# Altium PCB bdd_ext_pmm.PcbDoc
Units mm, origin at the board's own origin, x right, y up, seen from the top; angles counter-clockwise.
Board outline 42.5 x 45 mm, 2 copper layers (Top Layer, Bottom Layer); 5 components, 5 nets, 8 pads, 41 vias.
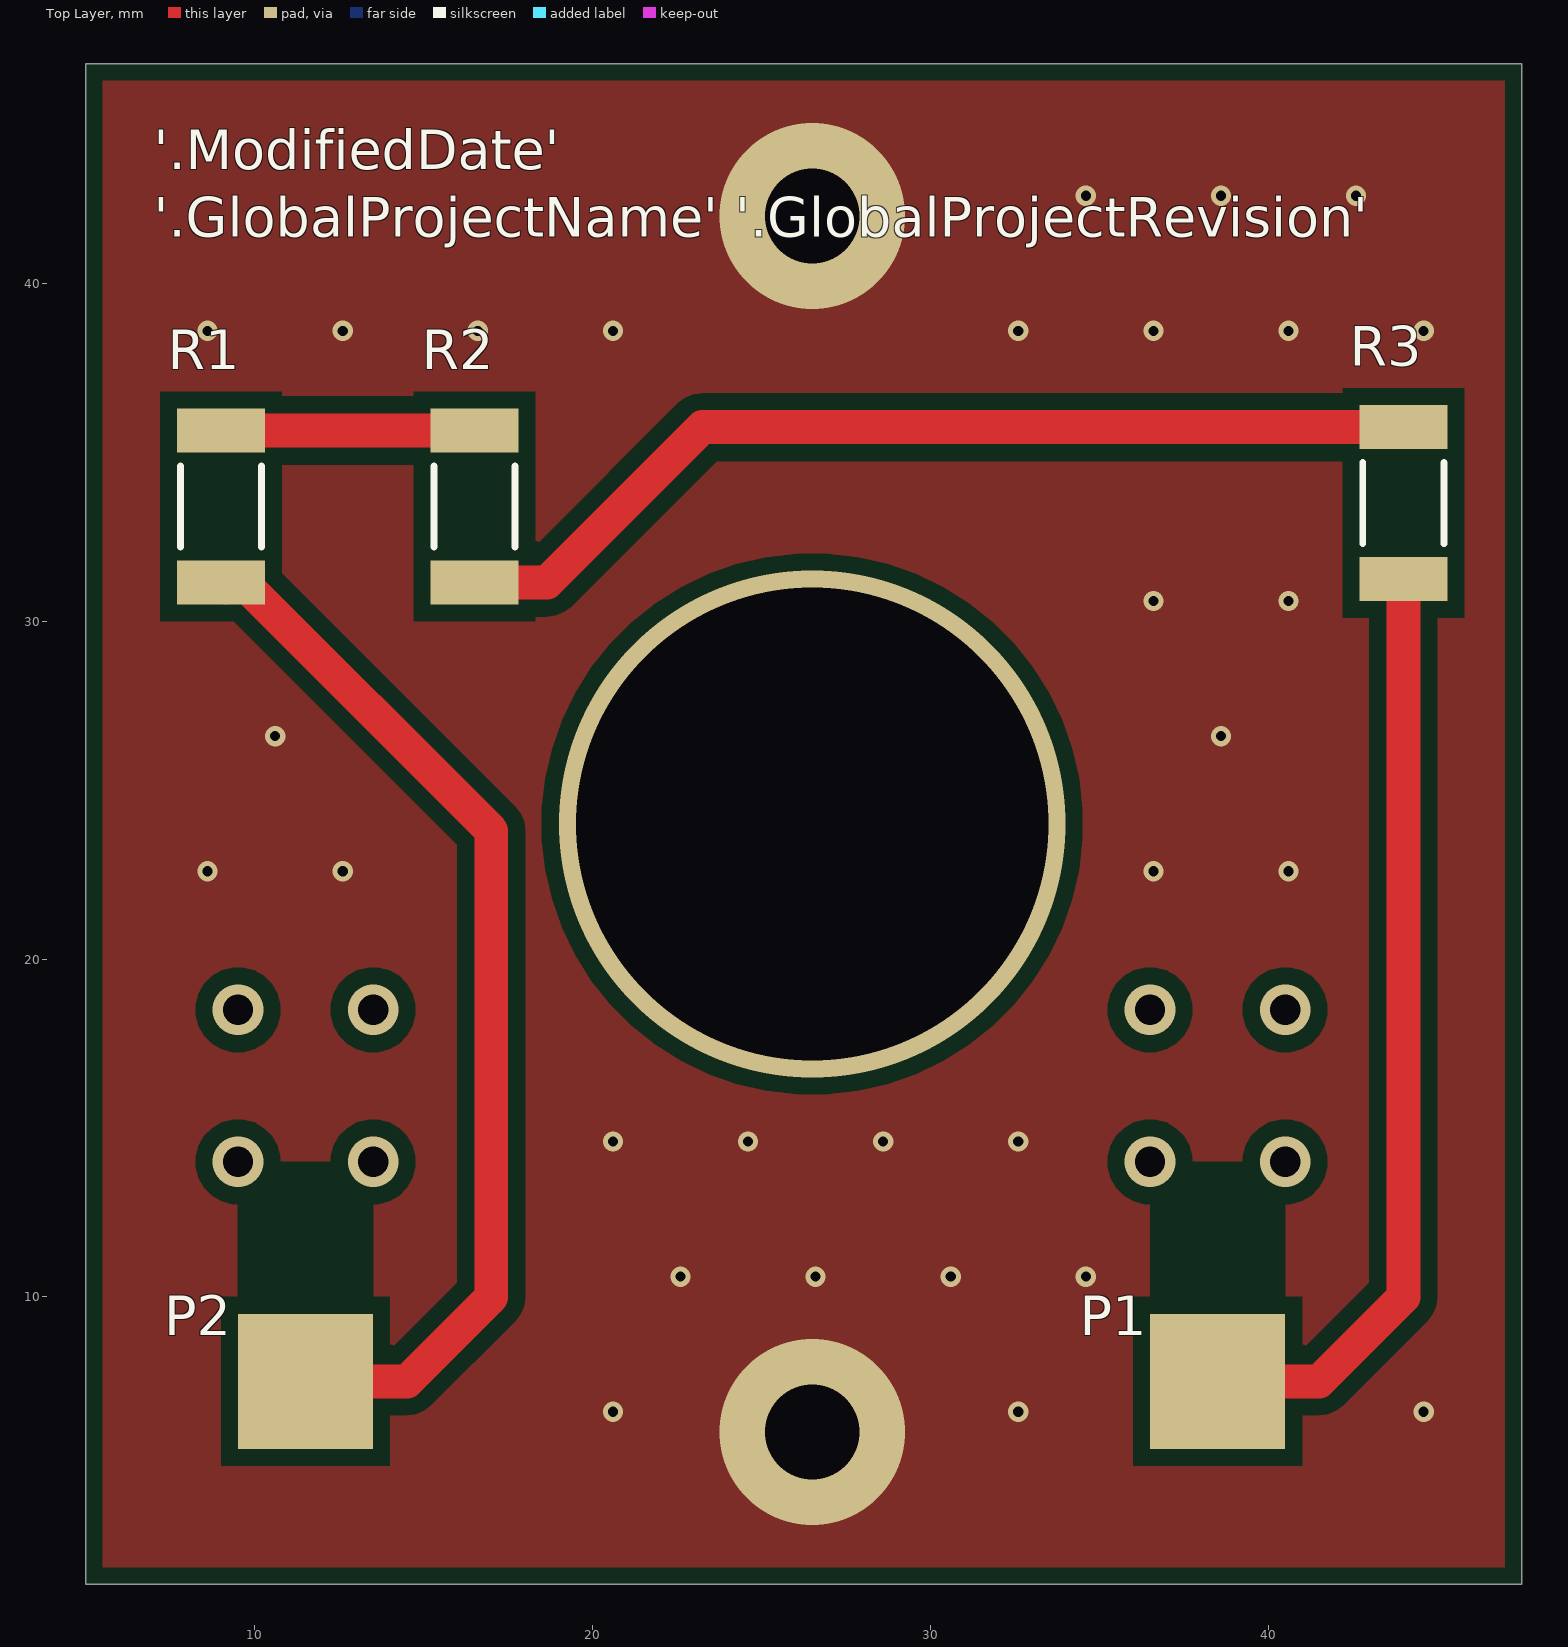
[diagram p0: Top Layer view]
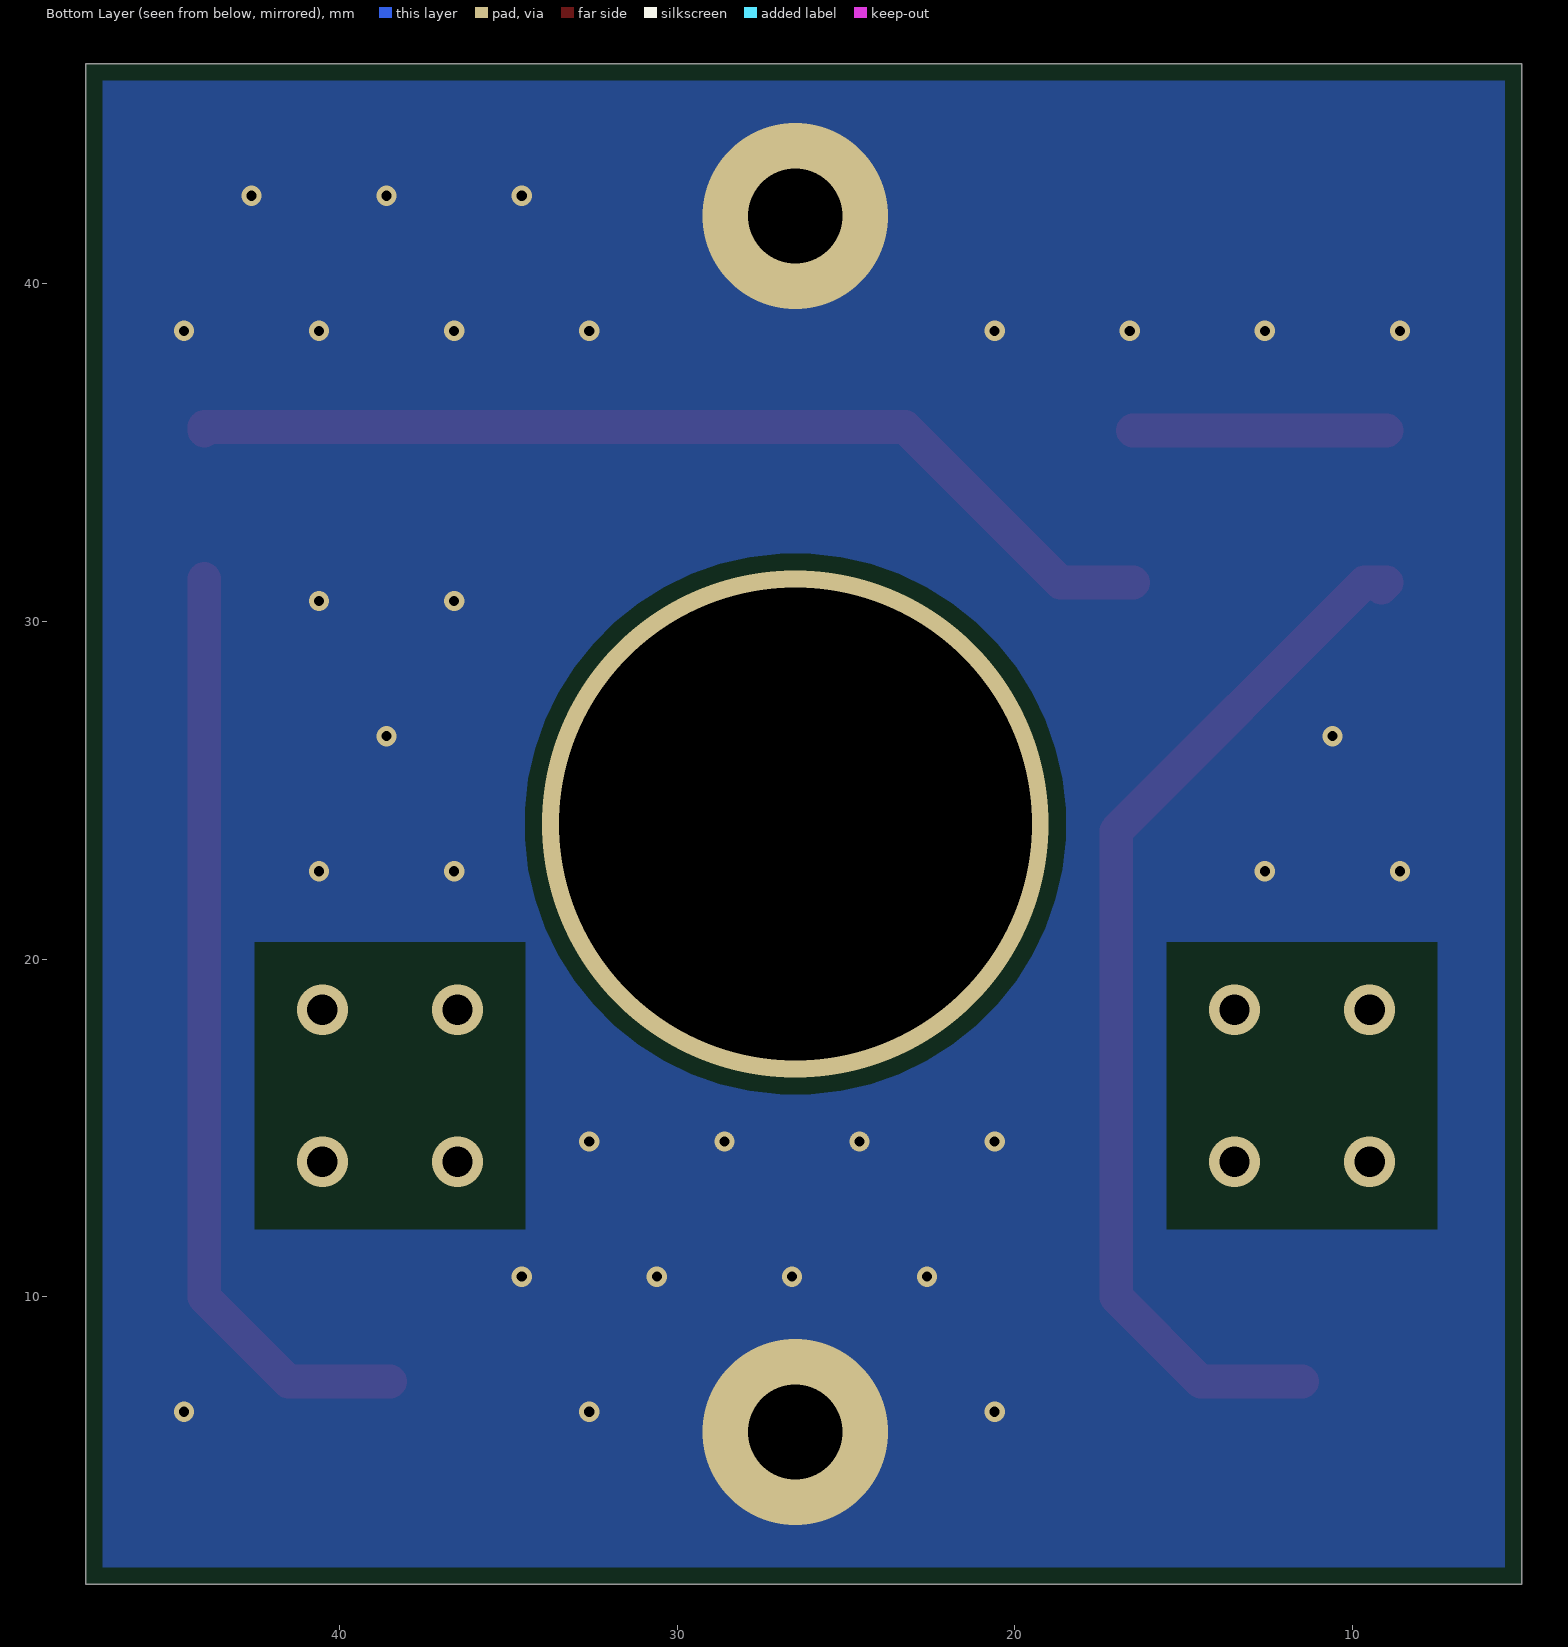
[diagram p1: Bottom Layer view, seen from below]

## Layer stack, top to bottom
Top Solder: solder mask 0.0102, Solder Resist, Dk 3.5
Top Layer: signal copper 0.0356
Dielectric 1: dielectric 0.32, FR-4, Dk 4.8
Bottom Layer: signal copper 0.0356
Bottom Solder: solder mask 0.0102, Solder Resist, Dk 3.5

## Board outline
5,1.5 47.5,1.5 47.5,46.5 5,46.5

## Design rules (kind name [scope] priority, off if disabled: settings)
Clearance "Stitching GND" [IsStitchingVia and InNet('GND') vs (IsVia and (Not IsStitchingVia)) Or IsPad] p1: gap=0.127 ignorepadtopadclearanceinfootprint=FALSE except(0.5: Arc-Via Track-Via SMDPad-Via THPad-Via Via-Via Via-Fill Via-Poly Via-Region Via-Text Via-Hole)
Clearance [All] p2: gap=0.5 ignorepadtopadclearanceinfootprint=FALSE
PolygonConnect [All] p1: connectstyle=Direct reliefconductorwidth=0.254 reliefentries=4 polygonreliefangle="90 Angle" airgapwidth=0.254
RoutingVias [All] p1: holewidth=0.711 width=1.27 viastyle="Through Hole" minholewidth=0.711 minwidth=1.27 maxholewidth=0.711 maxwidth=1.27
SolderMaskExpansion [All] p1: expansion=0.102 istentingtop=FALSE
Width [All] p1: maxlimit=1 minlimit=0.254 preferedwidth=0.8
30 further rules are at their usual default settings.

## Components (designator, comment, footprint, x,y, rotation, side; value= is the part's Value field where it differs from the comment)
P1 "PAD1" PAD1#1 38.5,8 r0 top
P2 "PAD1" PAD1#2 11.5,7.5 r0 top
R1 "2010" SMD_2010_1 9,33.4 r90 top value=500k
R2 "2010" SMD_2010_1 16.5,33.4 r270 top value=500k
R3 "2010" SMD_2010_1 44,33.5 r270 top value=500k

## Footprints (in the part's own frame and the unit in brackets; to place one, negate y for a bottom-side part, rotate by r counter-clockwise, add the part's x,y. Pads: shape width x height; smd on the part's side, far side on the other; paste and mask are expansions set on the pad)
PAD1#1 [mm]
  rect 4x4 smd: 1(0,-0.5)
PAD1#2 [mm]
  rect 4x4 smd: 1(0,0)
SMD_2010_1 [mm] "Chip Resistor, 2-Leads, Body 5,00x2,50mm, IPC Medium Density"
  rect 1.3x2.6 smd: 1(-2.25,0) 2(2.25,0)
  silkscreen extent -1.2,-1.2 1.2,1.2, body extent -2.55,-1.3 2.55,1.3, height 0.6

## Part data
R1 R2 R3: library part Resistor, "Resistor", Назначение=SMD-резистор, Наименование=R, Потребление, Вт=0,001, Точность=%

## Via types
v1: diameter 0.6, hole 0.3, Top Layer to Bottom Layer, 30 vias
v2: diameter 1.5, hole 0.9, Top Layer to Bottom Layer, 8 vias
v3: diameter 5.5, hole 2.8, Top Layer to Bottom Layer, 2 vias
v4: diameter 15, hole 14, Top Layer to Bottom Layer, 1 vias

## Nets (pads, with @x,y where several pads share a name; then routed paths per layer and width w, separated by ;. In a path a pad name is that pad's centre, name@x,y a point inside that pad or via, vN(x,y) a via of type N, cw(c..) or ccw(c..) an arc to the next point about the centre after c; other vN are vias at no path point)
GND: 
  other v1: 20.6,6.6 32.6,6.6 44.6,6.6 22.6,10.6 26.6,10.6 30.6,10.6 34.6,10.6 20.6,14.6 24.6,14.6 28.6,14.6 32.6,14.6 8.6,22.6 12.6,22.6 36.6,22.6 40.6,22.6 10.6,26.6 38.6,26.6 36.6,30.6 40.6,30.6 8.6,38.6 12.6,38.6 16.6,38.6 20.6,38.6 32.6,38.6 36.6,38.6 40.6,38.6 44.6,38.6 34.6,42.6 38.6,42.6 42.6,42.6
  other v3: 26.5,6 26.5,42
NetP1_1: P1.1 R3.2 | length 27.8
  Top Layer w1: P1.1 41.5,7.5 44,10 R3.2
NetP2_1: P2.1 R1.1 | length 31.6
  Top Layer w1: R1.1@9.15,31 R1.1 9.65,31.15 17,23.8 17,10 14.5,7.5 P2.1
NetR1_2: R1.2 R2.1 | length 7.5
  Top Layer w1: R1.2 R2.1
NetR2_2: R2.2 R3.1 | length 29.5
  Top Layer w1: R2.2 18.65,31.15 23.25,35.75 43.9,35.75 44,35.65 R3.1
copper on no net:
  other v2: 9.5,14 13.5,14 36.5,14 40.5,14 9.5,18.5 13.5,18.5 36.5,18.5 40.5,18.5
  other v4: 26.5,24

## Polygon pours and split planes (outlines as drawn)
GND on Top Layer "GND_L01_P000" (solid, pour order 0): 5.5,2 47,2 47,46 5.5,46
no net on Bottom Solder "NONET_L-01_P-001" (solid): 5.5,46 47,46 47,2 5.5,2
GND on Bottom Layer "GND_L02_P001" (solid, pour order 1): 5.5,2 47,2 47,46 5.5,46

## Other copper
Top Layer:
  pour cut-out: 14.7,36.5 14.7,30 18.3,30 18.3,36.5
  pour cut-out: 42.2,36.6 42.2,30.1 45.8,30.1 45.8,36.6
  pour cut-out: 7.2,36.5 7.2,30 10.8,30 10.8,36.5
  pour cut-out: 36.5,10 36.5,14 40.5,14 40.5,10
  pour cut-out: 9.5,10 9.5,14 13.5,14 13.5,10
Bottom Layer:
  pour cut-out: 34.5,20.5 34.5,12 42.5,12 42.5,20.5
  pour cut-out: 7.5,20.5 7.5,12 15.5,12 15.5,20.5

## Silkscreen, mask and mechanical layers (free items; w line width, h text height)
Top Overlay:
  text "'.ModifiedDate' / '.GlobalProjectName' '.GlobalProjectRevision'" at 7,41 h2
Mechanical 1:
  the board outline again, w0.127
Mechanical 2:
  circle w0.127: c26.5,24 r7
  circle w0.127: c26.5,6 r1.4
  circle w0.127: c26.5,42 r1.4
  circle w0.013: c26.5,6 r2.75
  circle w0.013: c26.5,42 r2.75
  circle w0.013: c26.5,24 r6.75
  circle w0.013: c26.5,24 r2.3
  circle w0.013: c26.5,24 r1.5
  circle w0.013: c26.5,24 r6.5
  circle w0.013: c26.5,24 r5.25
  circle w0.013: c26.5,24 r6.55
  lines w0.013: 2.5,47 1.5,46 1.5,46.51 cw(c2.5,46.51) 2.5,47.51 16.5,47.51 16.5,48.01 2.5,48.01 ccw(c2.5,46.51) 1,46.51 1,46 ; 3.373,21.297 ccw(c1.5,22) 3.5,22 ; 3.379,26.686 cw(c1.5,26) 3.5,26 ; 48.5,47 51.5,47 51.5,46 ; 1,46 1,1 2.5,1 48.5,1 ; 1,46 2.5,46 2.5,47.5 48.5,47.5 48.5,46 ; 1.65,22 ccw(c2.73,22.069) 2.5,21.011 ; 1.65,22 1.65,26 ; 1.65,22 1.933,22 ; 1.65,26 cw(c2.652,25.998) 2.5,26.989 ; 1.65,26 1.933,26 ; 1.933,22 ccw(c2.975,21.941) 2.5,21.011 ; 1.933,22 1.933,26 ; 1.933,26 cw(c2.896,26.105) 2.5,26.989 ; 2.5,21.011 ccw(c2.651,21.999) 3.65,22 3.65,26 ccw(c2.651,26.001) 2.5,26.989 ; 2.65,22 2.65,26 ; 2.65,22 2.5,22 2.5,26 2.65,26 ; 2.65,22 3.5,22 ; 2.65,26 3.5,26 ; 3.5,22 3.5,26 ; 48.5,1 48.5,46 ; 48.5,1 51.5,1 51.5,46 ; 48.5,46 51.5,46 ; 23.881,5.6 cw(c26.5,6) 23.881,6.4 23.948,6.4 24.049,6.4 28.951,6.4 29.052,6.4 29.119,6.4 cw(c26.5,6) 29.119,5.6 29.052,5.6 28.951,5.6 24.049,5.6 23.948,5.6 23.881,5.6 ; 23.881,41.6 cw(c26.5,42) 23.881,42.4 23.948,42.4 24.049,42.4 28.951,42.4 29.052,42.4 29.119,42.4 cw(c26.5,42) 29.119,41.6 29.052,41.6 28.951,41.6 24.049,41.6 23.948,41.6 23.881,41.6 ; 23.898,22.498 25.176,21.76 26.5,20.995 27.778,21.733 29.102,22.498 29.102,25.503 27.824,26.24 26.5,27.005 25.222,26.267 23.898,25.503 23.898,22.498
Mechanical 3:
  lines w0.013: 0.5,24 4.65,24 ; 17.5,24 21.5,24 ; 22.3,6 24,6 26.5,6 ; 22.3,42 24,42 26.5,42 ; 24,24 26.5,24 ; 26.5,1.8 26.5,3.5 26.5,6 ; 26.5,10.2 26.5,8.5 26.5,6 ; 26.5,15 26.5,19 ; 26.5,21.5 26.5,24 ; 26.5,26.5 26.5,24 ; 26.5,29 26.5,33 ; 26.5,37.8 26.5,39.5 26.5,42 ; 26.5,46.2 26.5,44.5 26.5,42 ; 29,24 26.5,24 ; 30.7,6 29,6 26.5,6 ; 30.7,42 29,42 26.5,42 ; 31.5,24 35.5,24